# Altium PCB Jupiter PCB.PcbDoc (part 1 of 2)
Units mm, origin at the board's own origin, x right, y up, seen from the top; angles counter-clockwise.
Board outline 17.4 x 70.23 mm, 4 copper layers (Top Layer (SIG), Layer 1 (GND), Layer 2 (PWR), Bottom Layer (SIG)), stack 1.603 mm thick; 59 components, 32 nets, 227 pads, 175 vias.
Unrouted connection lines stored in the file: 2.
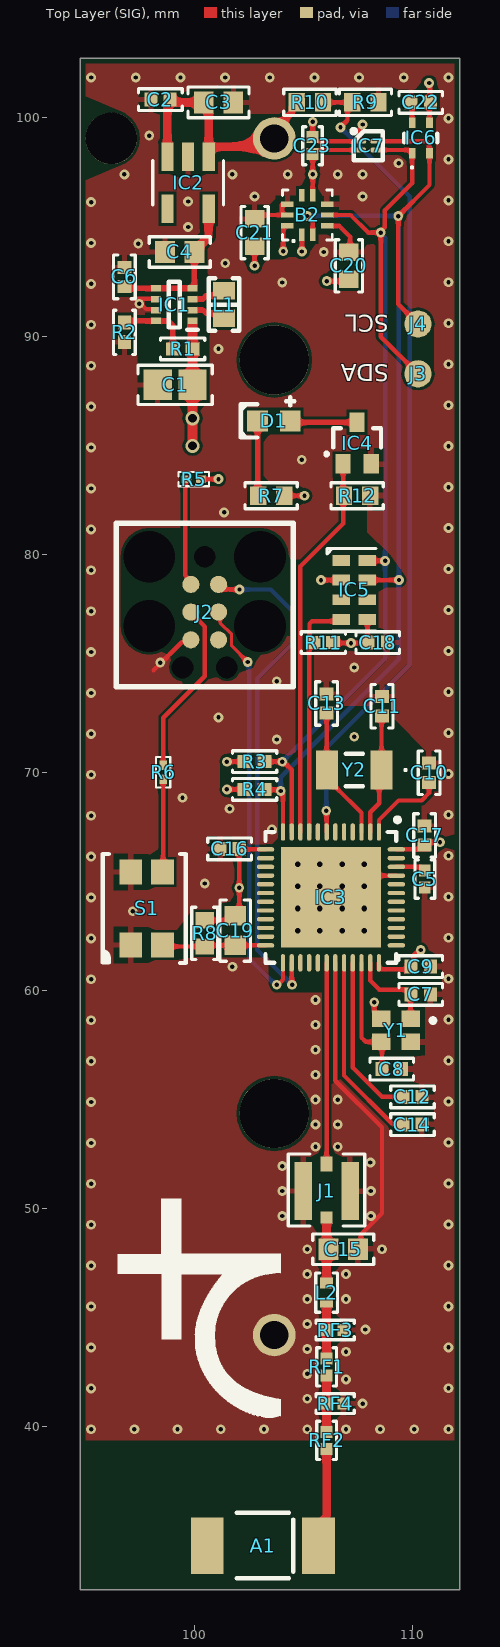
[diagram p0: Top Layer (SIG) view]
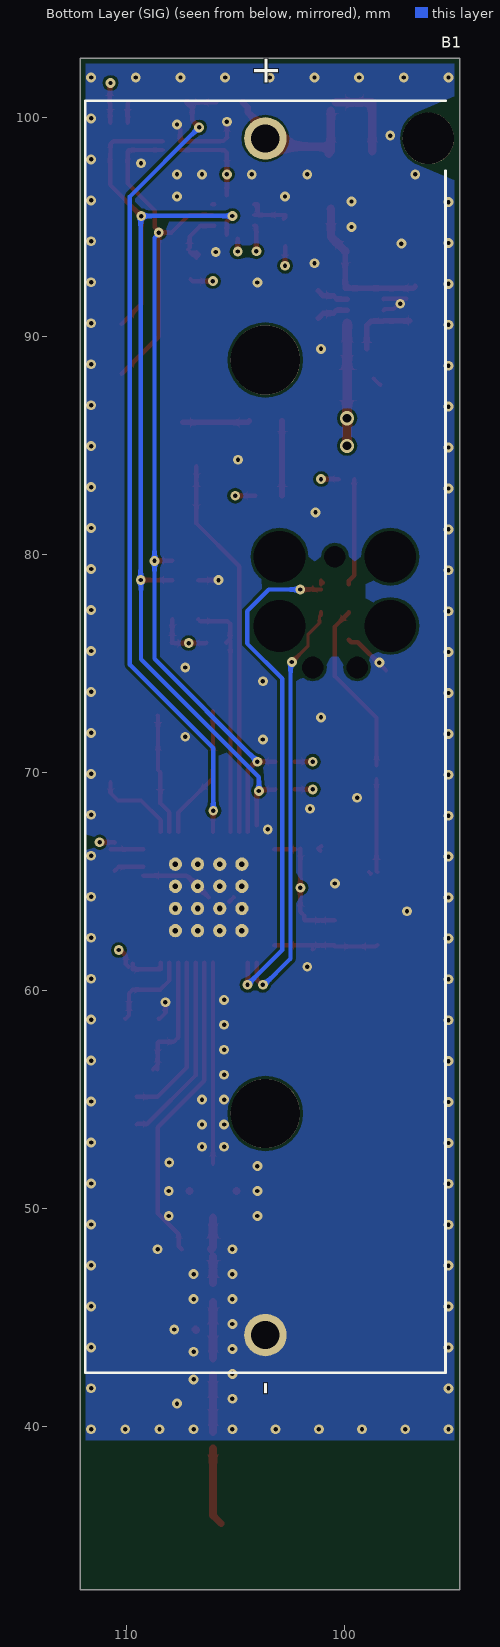
[diagram p1: Bottom Layer (SIG) view, seen from below]
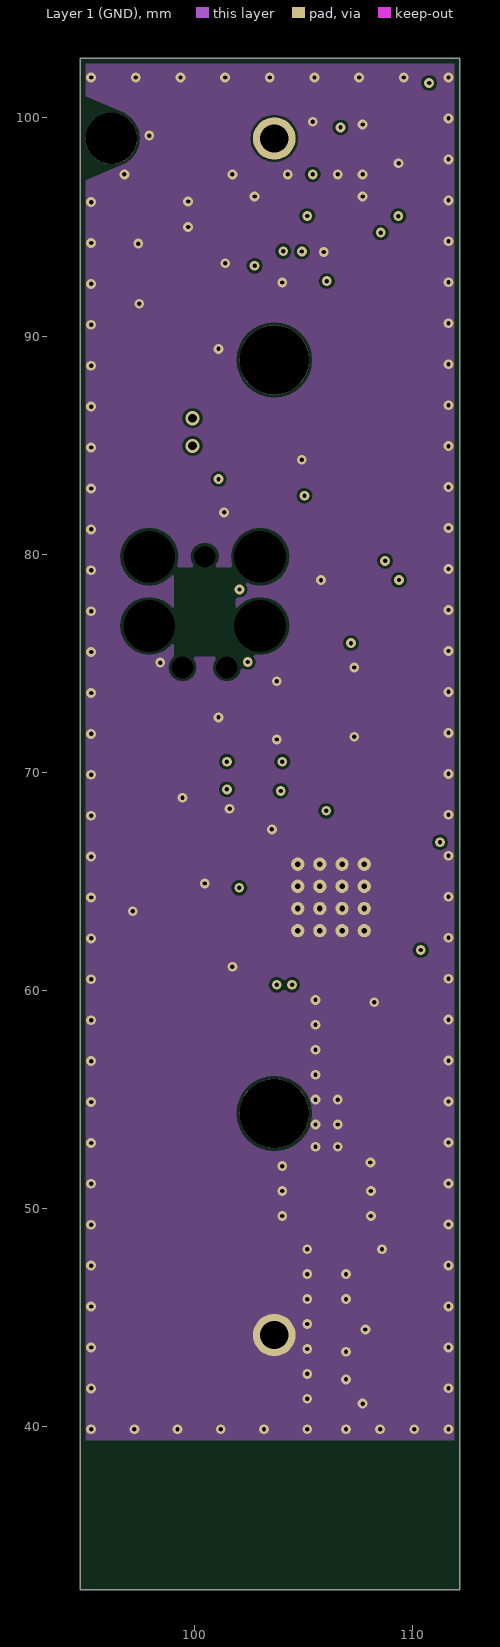
[diagram p2: Layer 1 (GND)]
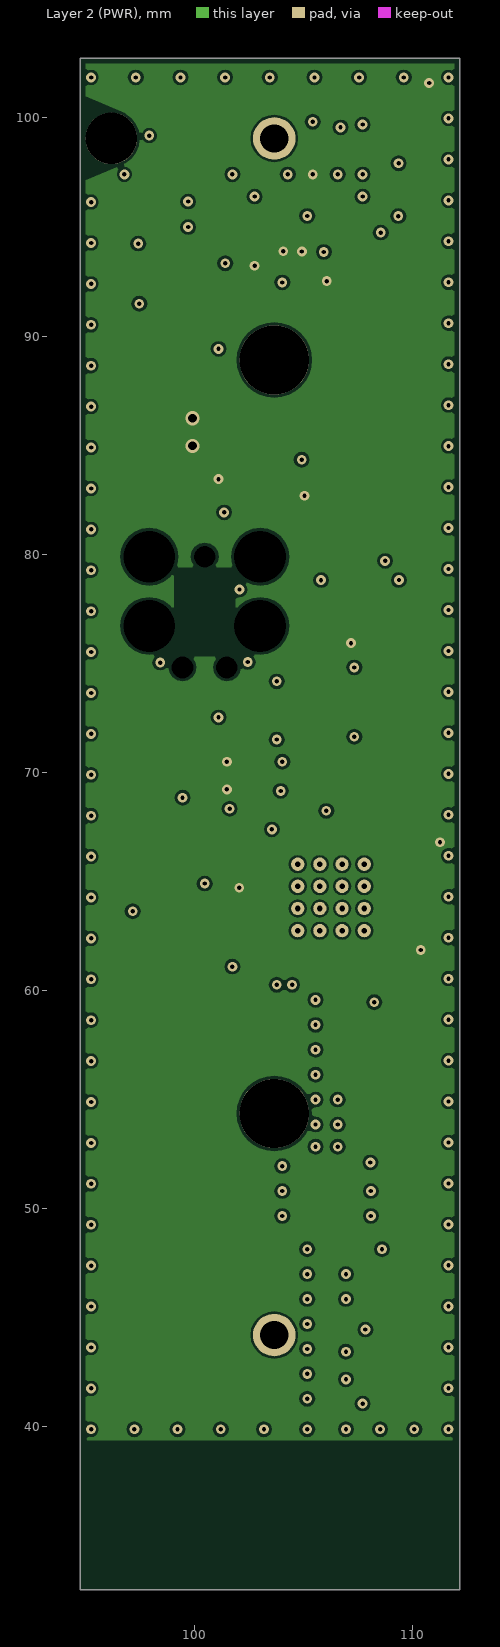
[diagram p3: Layer 2 (PWR)]

## Layer stack, top to bottom
Top Solder: solder mask 0.0102, Solder Resist, Dk 3.5
Top Layer (SIG): signal copper 0.0356
Dielectric 2: prepreg 0.0711, PP-006, Dk 4.1
Layer 1 (GND): signal copper 0.035
Dielectric 1: dielectric 1.32, FR-4, Dk 4.8
Layer 2 (PWR): signal copper 0.035
Dielectric 3: prepreg 0.0711, PP-006, Dk 4.1
Bottom Layer (SIG): signal copper 0.0356
Bottom Solder: solder mask 0.0102, Solder Resist, Dk 3.5

## Board outline
94.742,32.512 94.742,102.743 112.141,102.743 112.141,32.512

## Design rules (kind name [scope] priority, off if disabled: settings)
Clearance [All] p1: gap=0.127 ignorepadtopadclearanceinfootprint=FALSE except(0: Arc-SMDPad Arc-THPad Arc-Hole Track-SMDPad Track-THPad Track-Hole SMDPad-SMDPad SMDPad-THPad SMDPad-Hole THPad-THPad THPad-Via THPad-Fill THPad-Region THPad-Text THPad-Hole Fill-Hole Region-Hole Text-Hole; 0.102: THPad-Poly)
HoleSize [All] p1: absolutevalues=TRUE maxlimit=6 minlimit=0.025 maxpercent=80.000 minpercent=20.000
MinimumAnnularRing [All] p1: minimumring=0.051
MinimumSolderMaskSliver [All] p1: minsoldermaskwidth=0
PasteMaskExpansion [All] p1: expansion=0.127
PolygonConnect PolygonConnect_22 [All vs IsNamedPolygon('GND_L02_P001')] p1: thpad.connectstyle=Direct thpad.reliefconductorwidth=0.254 thpad.reliefentries=4 thpad.polygonreliefangle="90 Angle" thpad.airgapwidth=0.254 smdpad.connectstyle=Relief smdpad.reliefconductorwidth=0.254 smdpad.reliefentries=4 smdpad.polygonreliefangle="90 Angle" smdpad.airgapwidth=0.254 via.connectstyle=Direct via.reliefconductorwidth=0.254 via.reliefentries=4 via.polygonreliefangle="90 Angle" via.airgapwidth=0.254
PolygonConnect PolygonConnect_21 [All vs IsNamedPolygon('V_REG_3V_L03_P002')] p2: thpad.connectstyle=Direct thpad.reliefconductorwidth=0.254 thpad.reliefentries=4 thpad.polygonreliefangle="90 Angle" thpad.airgapwidth=0.254 smdpad.connectstyle=Relief smdpad.reliefconductorwidth=0.254 smdpad.reliefentries=4 smdpad.polygonreliefangle="90 Angle" smdpad.airgapwidth=0.254 via.connectstyle=Direct via.reliefconductorwidth=0.254 via.reliefentries=4 via.polygonreliefangle="90 Angle" via.airgapwidth=0.254
PolygonConnect PolygonConnect_20 [All vs IsNamedPolygon('GND_L04_P003')] p3: thpad.connectstyle=Direct thpad.reliefconductorwidth=0.254 thpad.reliefentries=4 thpad.polygonreliefangle="90 Angle" thpad.airgapwidth=0.254 smdpad.connectstyle=Relief smdpad.reliefconductorwidth=0.254 smdpad.reliefentries=4 smdpad.polygonreliefangle="90 Angle" smdpad.airgapwidth=0.254 via.connectstyle=Direct via.reliefconductorwidth=0.254 via.reliefentries=4 via.polygonreliefangle="90 Angle" via.airgapwidth=0.254
PolygonConnect PolygonConnect_19 [All vs IsNamedPolygon('GND_L01_P000')] p4: thpad.connectstyle=Direct thpad.reliefconductorwidth=0.254 thpad.reliefentries=4 thpad.polygonreliefangle="90 Angle" thpad.airgapwidth=0.254 smdpad.connectstyle=Relief smdpad.reliefconductorwidth=0.254 smdpad.reliefentries=4 smdpad.polygonreliefangle="90 Angle" smdpad.airgapwidth=0.254 via.connectstyle=Direct via.reliefconductorwidth=0.254 via.reliefentries=4 via.polygonreliefangle="90 Angle" via.airgapwidth=0.254
PolygonConnect PolygonConnect_18 [All vs IsNamedPolygon('NONET_L03_P004')] p5: connectstyle=Relief reliefconductorwidth=0.254 reliefentries=4 polygonreliefangle="90 Angle" airgapwidth=0.254
PolygonConnect PolygonConnect_17 [All vs IsNamedPolygon('NONET_L02_P003')] p6: connectstyle=Relief reliefconductorwidth=0.254 reliefentries=4 polygonreliefangle="90 Angle" airgapwidth=0.254
PolygonConnect PolygonConnect_16 [All vs IsNamedPolygon('NONET_L01_P002')] p7: connectstyle=Relief reliefconductorwidth=0.254 reliefentries=4 polygonreliefangle="90 Angle" airgapwidth=0.254
PolygonConnect PolygonConnect_15 [All vs IsNamedPolygon('GND_L01_P000')] p8: connectstyle=Relief reliefconductorwidth=0.254 reliefentries=4 polygonreliefangle="90 Angle" airgapwidth=0.254
PolygonConnect PolygonConnect_14 [All vs IsNamedPolygon('NONET_L03_P038')] p9: connectstyle=Relief reliefconductorwidth=0.254 reliefentries=4 polygonreliefangle="90 Angle" airgapwidth=0.254
PolygonConnect PolygonConnect_13 [All vs IsNamedPolygon('NONET_L02_P037')] p10: connectstyle=Relief reliefconductorwidth=0.254 reliefentries=4 polygonreliefangle="90 Angle" airgapwidth=0.254
PolygonConnect PolygonConnect_12 [All vs IsNamedPolygon('Top Layer-GND')] p11: connectstyle=Relief reliefconductorwidth=0.254 reliefentries=4 polygonreliefangle="90 Angle" airgapwidth=0.254
PolygonConnect PolygonConnect_11 [All vs IsNamedPolygon('Layer 2-V_REG_3V')] p12: connectstyle=Relief reliefconductorwidth=0.254 reliefentries=4 polygonreliefangle="90 Angle" airgapwidth=0.254
PolygonConnect PolygonConnect_10 [All vs IsNamedPolygon('Top Overlay-GND')] p13: connectstyle=Relief reliefconductorwidth=0.254 reliefentries=4 polygonreliefangle="90 Angle" airgapwidth=0.254
PolygonConnect PolygonConnect_9 [All vs IsNamedPolygon('NONET_L03_P018')] p14: connectstyle=Relief reliefconductorwidth=0.254 reliefentries=4 polygonreliefangle="90 Angle" airgapwidth=0.254
PolygonConnect PolygonConnect_8 [All vs IsNamedPolygon('NONET_L02_P017')] p15: connectstyle=Relief reliefconductorwidth=0.254 reliefentries=4 polygonreliefangle="90 Angle" airgapwidth=0.254
PolygonConnect PolygonConnect_7 [All vs IsNamedPolygon('NONET_L01_P016')] p16: connectstyle=Relief reliefconductorwidth=0.254 reliefentries=4 polygonreliefangle="90 Angle" airgapwidth=0.254
PolygonConnect PolygonConnect_6 [All vs IsNamedPolygon('NONET_L01_P016')] p17: connectstyle=Relief reliefconductorwidth=0.254 reliefentries=4 polygonreliefangle="90 Angle" airgapwidth=0.254
PolygonConnect PolygonConnect_5 [All vs IsNamedPolygon('NONET_L01_P015')] p18: connectstyle=Relief reliefconductorwidth=0.254 reliefentries=4 polygonreliefangle="90 Angle" airgapwidth=0.254
PolygonConnect PolygonConnect_4 [All vs IsNamedPolygon('NONET_L02_P014')] p19: connectstyle=Relief reliefconductorwidth=0.254 reliefentries=4 polygonreliefangle="90 Angle" airgapwidth=0.254
PolygonConnect PolygonConnect_3 [All vs IsNamedPolygon('NONET_L03_P013')] p20: connectstyle=Relief reliefconductorwidth=0.254 reliefentries=4 polygonreliefangle="90 Angle" airgapwidth=0.254
PolygonConnect PolygonConnect_2 [All vs IsNamedPolygon('NONET_L04_P012')] p21: connectstyle=Relief reliefconductorwidth=0.254 reliefentries=4 polygonreliefangle="90 Angle" airgapwidth=0.254
PolygonConnect PolygonConnect_1 [All vs IsNamedPolygon('GND_L01_P011')] p22: connectstyle=Relief reliefconductorwidth=0.254 reliefentries=4 polygonreliefangle="90 Angle" airgapwidth=0.254
PolygonConnect [All] p23: connectstyle=Relief reliefconductorwidth=0.254 reliefentries=4 polygonreliefangle="90 Angle" airgapwidth=0.254
RoutingVias [All] p1: holewidth=0.005 width=0.01 viastyle="Through Hole" minholewidth=0.005 minwidth=0.01 maxholewidth=0.254 maxwidth=0.457
SilkToSilkClearance [All] p1: silktosilkclearance=0
SilkToSolderMaskClearance [IsPad] p1: minsilkscreentomaskgap=0 clearancetoexposedcopper=TRUE
SolderMaskExpansion [All] p1: expansion=0.127 istentingtop=FALSE
Width [All] p1: maxlimit=0.762 minlimit=0.127 preferedwidth=0.178 midlayer1_minwidth=0.152 midlayer1_maxwidth=0.381 midlayer2_minwidth=0.152 midlayer2_maxwidth=0.381 bottomlayer_maxwidth=0.381 minimp=50.000000 maximp=50.000000 favimp=50.000000
25 further rules are at their usual default settings.

## Classes and differential pairs
component class Designator: A1 C5 C7 C8 C9 C10 C11 C12 C13 C14 C15 C16 C17 IC3 J1 J2 J3 J4 L2 R3 R4 R5 R6 RF1 RF2 RF3 RF4 Y1 Y2

## Components (designator, comment, footprint, x,y, rotation, side; value= is the part's Value field where it differs from the comment)
A1 "2.45GHz Antenna" "FRACTUS ANTENNAS FR01-S1-N-0-102" 103.124,34.544 r180 top
B1 "24.5mm Coin Cell (×1)" "MPD BHAA-3" 103.646,71.628 r90 bottom locked
B2 "BMP390" BMP390 105.16,95.548 r180 top value="-40°C ~ 125°C Temp Sense"
C1 "47µF" "CAP 0805_2012" 99.098,87.757 r0 top
C2 "0.1µF" "CAP 0402_1005" 98.425,100.838 r0 top
C3 "10pF" "CAP 0603_1608" 101.092,100.711 r180 top
C4 "10pF" "CAP 0603_1608" 99.314,93.853 r0 top
C5 "1µF" "CAP 0402_1005 RF" 110.549,65.097 r90 top
C6 "22uF" "CAP 0402_1005" 96.774,92.71 r270 top
C7 "8pF" "CAP 0402_1005" 110.363,59.817 r180 top
C8 "8pF" "CAP 0402_1005" 109.034,56.388 r0 top
C9 "0.1µF" "CAP 0402_1005" 110.363,61.087 r180 top
C10 "0.1µF" "CAP 0402_1005" 110.744,69.977 r90 top
C11 "9pF" "CAP 0402_1005" 108.585,73.025 r270 top
C12 "100pF" "CAP 0402_1005" 109.982,55.118 r0 top
C13 "9pF" "CAP 0402_1005" 106.045,73.152 r270 top
C14 "100pF" "CAP 0402_1005" 109.982,53.848 r0 top
C15 "0.8pF" "CAP 0603_1608" 106.807,48.133 r180 top
C16 "0.1µF" "CAP 0402_1005" 101.6,66.489 r0 top
C17 "4.7uF" "CAP 0402_1005" 110.542,67.102 r270 top
C18 "0.1µF" "CAP 0402_1005" 108.39,75.946 r180 top
C19 "0.15µF" "CAP 0603_1608" 101.854,62.738 r90 top
C20 "0.1µF" "CAP 0603_1608 RF" 107.061,93.218 r270 top
C21 "0.1µF" "CAP 0603_1608 RF" 102.743,94.742 r270 top
C22 "0.1µF" "CAP 0402_1005" 110.363,100.711 r0 top
C23 "2.2µF" "CAP 0402_1005 RF" 105.397,98.724 r270 top
D1 "RED" "LED 0603_1608" 103.632,86.106 r0 top
IC1 "Buck Regulator" "TI SOT-583" 99.06,91.44 r180 top
IC2 "Ideal Diode" "MAXIM SOT-23-5" 99.695,97.028 r270 top
IC3 "RF SoC" "NORDIC QFN-48" 106.245,64.262 r270 top
IC4 "NEXPERIA MOSFET N-CH SOT-323" "NEXPERIA SOT-323" 107.442,85.09 r90 top value=NFET
IC5 "Real Time Clock" "MICRO CRYSTAL 8-SON" 107.315,78.359 r0 top
IC6 "-40°C ~ 125°C Temp Sense" "SENSIRION SHT45" 110.363,99.079 r90 top
IC7 "MMC5633" "MEMSIC MMC5633" 107.95,98.727 r0 top value="Magnetoresistive Sensor X, Y, Z Axis"
J1 "Coaxial Switch" "HIROSE MS-156HF(01)" 106.045,50.8 r0 top
J2 "6 Pin J-Link Needle" "J-LINK 6-PIN NEEDLE" 100.457,79.883 r270 top
J3 "TEST POINT" "TEST POINT" 110.236,88.265 r0 top value="Test Point"
J4 "TEST POINT" "TEST POINT" 110.236,90.551 r0 top value="Test Point"
L1 "1.0µH" "NTC 0603_1608" 101.346,91.44 r270 top
L2 "3.9nH" "IND 0402_1005" 106.045,46.142 r270 top
R1 "511kΩ" "RES 0402_1005 RF" 99.448,89.408 r0 top
R2 "91kΩ" "RES 0402_1005 RF" 96.774,90.17 r90 top
R3 "4.7kΩ" "RES 0402_1005 RF" 102.743,70.485 r180 top
R4 "4.7kΩ" "RES 0402_1005 RF" 102.743,69.215 r180 top
R5 "33Ω" "RES 0201_0603" 99.949,83.439 r0 top
R6 "33Ω" "RES 0201_0603" 98.552,70.001 r270 top
R7 "60Ω" "RES 0603_1608 RF" 103.505,82.677 r180 top
R8 "249kΩ" "RES 0603_1608 RF" 100.457,62.611 r90 top
R9 "10MΩ" "RES 0603_1608 RF" 107.823,100.711 r0 top
R10 "1MΩ" "RES 0603_1608 RF" 105.283,100.711 r0 top
R11 "4.7kΩ" "RES 0402_1005 RF" 105.894,75.943 r0 top
R12 "1MΩ" "RES 0603_1608 RF" 107.442,82.677 r180 top
RF1 "0402" "0402_1005 RF" 106.045,42.741 r270 top
RF2 "0402" "0402_1005 RF" 106.045,39.37 r270 top
RF3 "0402" "0402_1005 RF" 106.435,44.427 r180 top
RF4 "0402" "0402_1005 RF" 106.435,41.056 r180 top
S1 "SPST-NO" "PANASONIC EVP-AA002K" 97.79,63.754 r90 top
Y1 "32.0000MHz" "ECS 320-8-37B" 109.22,58.166 r180 top
Y2 "32.7680kHz" "EPSON FC135R" 107.315,70.104 r180 top

## Footprints (in the part's own frame and the unit in brackets; to place one, negate y for a bottom-side part, rotate by r counter-clockwise, add the part's x,y. Pads: shape width x height; smd on the part's side, far side on the other; paste and mask are expansions set on the pad)
"0402_1005 RF" [mm] "2-Leads, Body 1.02x0.51mm, IPC High Density"
  rect 0.55x0.54 smd: 1(-0.39,0) 2(0.39,0)
  silkscreen extent -0.87,-0.45 0.87,0.45, body extent -0.5,-0.26 0.5,0.26, height 0.52
BMP390 [mm]
  rect 0.25x0.575 smd: 1(0.25,0.913) 2(-0.25,0.913) 6(-0.25,-0.913) 7(0.25,-0.913)
  rect 0.575x0.25 smd: 3(-0.912,0.5) 4(-0.912,0) 5(-0.912,-0.5) 8(0.912,-0.5) 9(0.912,0) 10(0.912,0.5)
  silkscreen extent -1.14,-1.14 1.14,1.24, body extent -1.02,-1.02 1.02,1.02, height 0.25
"CAP 0402_1005" [mm] "Chip Capacitor, 2-Leads, Body 1.02x0.51mm, IPC Medium Density"
  rect 0.6x0.64 smd mask+0.05: 1(-0.44,0) 2(0.44,0)
  silkscreen extent -1,-0.5 1,0.5, body extent -0.5,-0.26 0.5,0.26, height 0.52
"CAP 0402_1005 RF" [mm] "Chip Capacitor, 2-Leads, Body 1.02x0.51mm, IPC High Density"
  rect 0.55x0.54 smd mask+0.05: 1(-0.39,0) 2(0.39,0)
  silkscreen extent -0.87,-0.45 0.87,0.45, body extent -0.5,-0.26 0.5,0.26, height 0.52
"CAP 0603_1608" [mm] "Chip Capacitor, 2-Leads, Body 1.60x0.80mm, IPC Medium Density"
  rect 0.9x1 smd: 1(-0.675,0) 2(0.675,0)
  silkscreen extent -1.4,-0.7 1.4,0.7, body extent -0.8,-0.41 0.8,0.41, height 0.82
"CAP 0603_1608 RF" [mm] "Chip Capacitor, 2-Leads, Body 1.60x0.80mm, IPC High Density"
  rect 0.8x0.9 smd: 1(-0.625,0) 2(0.625,0)
  silkscreen extent -1.2,-0.63 1.2,0.63, body extent -0.8,-0.41 0.8,0.41, height 0.82
"CAP 0805_2012" [mm] "Chip Capacitor, 2-Leads, Body 2.00x1.20mm, IPC Medium Density"
  rect 1.3x1.4 smd: 1(-0.8,0) 2(0.8,0)
  silkscreen extent -1.7,-0.9 1.7,0.9, body extent -1,-0.64 1,0.64, height 1.26
"ECS 320-8-37B" [mm] "Crystal, 2-Leads, Body 4.10x7.00mm, Pitch 5.00mm, IPC Medium Density"
  rect 0.85x0.75 smd: 1(-0.675,-0.525) 2(0.675,-0.525) 3(0.675,0.525) 4(-0.675,0.525)
  silkscreen extent -1.8,-0.55 -1.6,-0.35, body extent -1,-0.8 1,0.8, height 0.5
"EPSON FC135R" [mm] "Crystal, 4-Leads, Body 2.50x3.20mm, Pitch 2.20mm, IPC Medium Density"
  rect 1x1.8 smd: 1(-1.25,0) 2(1.25,0)
  silkscreen extent -2.4,-0.75 0.4,0.75
"FRACTUS ANTENNAS FR01-S1-N-0-102" [mm]
  rect 1.5x2.6 smd: G(2.55,0) S(-2.55,0)
  silkscreen extent -1.4,-1.5 1.2,1.5, body extent -3.5,-1.5 3.5,1.5, height 2
"HIROSE MS-156HF(01)" [mm]
  rect 0.55x0.7 smd: A(0,1.245)
  rect 0.55x0.55 smd: C(0,-1.219)
  rect 0.8x2.65 smd: G(-1.075,0) G(1.075,0)
  silkscreen extent -1.75,-1.6 1.75,1.7, body extent -1.37,-1.37 1.38,1.45, height 2
"IND 0402_1005" [mm] "Inductor, 2-Leads, Body 1.02x0.51mm, IPC Medium Density"
  rect 0.5x0.6 smd: 1(-0.44,0) 2(0.44,0)
  silkscreen extent -0.9,-0.5 0.9,0.5, body extent -0.5,-0.3 0.5,0.3, height 0.6
"J-LINK 6-PIN NEEDLE" [mm]
  round 0.787 smd mask+0: 1(1.27,-0.635) 2(1.27,0.635) 3(2.54,-0.635) 4(2.54,0.635) 5(3.81,-0.635) 6(3.81,0.635)
  round 0 hole 2.375 unplated: NC(0,2.54) NC(0,-2.54) NC(3.175,2.54) NC(3.175,-2.54)
  round 0 hole 0.991 unplated: S(0,0) S(5.08,-1.016) S(5.08,1.016)
  silkscreen extent -1.52,-4.06 5.97,4.06
"LED 0603_1608" [mm]
  rect 0.95x0.95 smd: 1(-0.75,0) 2(0.75,0)
  silkscreen extent -1.52,-0.76 0.94,1.09
"MAXIM SOT-23-5" [mil] "SOT23, 6-Leads, Body 2.90x2.80mm, Pitch 0.95mm, IPC Medium Density"
  rect 52x22 smd: 1(-47,37.4) 2(-47,0) 3(-47,-37.4) 4(47,-37.4) 5(47,37.4)
  silkscreen extent -40,-64 40,64, body extent -59,-59 59,59, height 57
"MEMSIC MMC5633" [mm] "BGA, 6-Leads, Body 0.8x1.22mmx0.425mm, Pitch 0.40mm"
  oval 0.626x0.226 smd: A1(-0.4,0.2) A2(0.4,0.2) B1(-0.4,-0.2) B2(0.4,-0.2)
  silkscreen extent -0.76,-0.66 0.66,0.76, body extent -0.47,-0.47 0.48,0.47, height 0.6
"MICRO CRYSTAL 8-SON" [mm] "SON, 8-Leads, Body 3.20x1.50mm, Pitch 0.9mm, Thermal Pad 1.90x2.45mm, IPC Medium Density"
  rect 0.8x0.5 smd paste-3 mask+0.05: 1(-0.6,1.35) 2(-0.6,0.45) 3(-0.6,-0.45) 4(-0.6,-1.35) 5(0.6,-1.35) 6(0.6,-0.45) 7(0.6,0.45) 8(0.6,1.35)
  silkscreen extent -1.25,-1.9 1,1.9, body extent -0.75,-1.6 0.75,1.6, height 0.8
"MPD BHAA-3" [mm]
  round 1.95 hole 1.3: NEG(-27.43,0)
  round 1.95 hole 1.3 paste+0.25 mask+0.25: POS(27.43,0)
  round 3.18 hole 3.18 unplated: ""(-17.27,0) ""(17.27,0)
  round 2.36 hole 2.36 unplated: ""(27.43,-7.47)
  silkscreen extent -29.16,-8.26 29.16,8.26, body extent -29.09,-8.26 29.23,8.25, height 19.81
"NEXPERIA SOT-323" [mm] "SOT323, 3-Leads, Body 2.00x2.10mm, Pitch 0.65mm, IPC Medium Density"
  rect 0.9x0.7 smd: 1(-0.95,0.65) 2(-0.95,-0.65) 3(0.95,0)
  silkscreen extent -0.53,-1.1 0.67,1.43, body extent -1.05,-1.05 1.05,1.05, height 1
"NORDIC QFN-48" [mm] "QFN-48"
  oval 0.8x0.2 smd mask+0.06: 1(-3,2.2) 2(-3,1.8) 3(-3,1.4) 4(-3,1) 5(-3,0.6) 6(-3,0.2) 7(-3,-0.2) 8(-3,-0.6) 9(-3,-1) 10(-3,-1.4) 11(-3,-1.8) 12(-3,-2.2) 25(3,-2.2) 26(3,-1.8) 27(3,-1.4) 28(3,-1) 29(3,-0.6) 30(3,-0.2) 31(3,0.2) 32(3,0.6) 33(3,1) 34(3,1.4) 35(3,1.8) 36(3,2.2)
  oval 0.2x0.8 smd mask+0.06: 13(-2.2,-3) 14(-1.8,-3) 15(-1.4,-3) 16(-1,-3) 17(-0.6,-3) 18(-0.2,-3) 19(0.2,-3) 20(0.6,-3) 21(1,-3) 22(1.4,-3) 23(1.8,-3) 24(2.2,-3) 37(2.2,3) 38(1.8,3) 39(1.4,3) 40(1,3) 41(0.6,3) 42(0.2,3) 43(-0.2,3) 44(-0.6,3) 45(-1,3) 46(-1.4,3) 47(-1.8,3) 48(-2.2,3)
  round 0.61 hole 0.254 mask+0.102: EXP(-1.524,1.524) EXP(-1.524,0.508) EXP(-1.524,-0.508) EXP(-1.524,-1.524) EXP(-0.508,1.524) EXP(-0.508,0.508) EXP(-0.508,-0.508) EXP(-0.508,-1.524) EXP(0.508,1.524) EXP(0.508,0.508) EXP(0.508,-0.508) EXP(0.508,-1.524) EXP(1.524,1.524) EXP(1.524,0.508) EXP(1.524,-0.508) EXP(1.524,-1.524)
  rect 4.6x4.6 smd: EXP(0,0)
  silkscreen extent -3.66,-3 3,3.15, body extent -3.02,-3.02 3.02,3.02, height 0.85
"NTC 0603_1608" [mm] "NTC Thermistor, 2-Leads, Body 1.60x0.80mm, IPC Medium Density"
  rect 0.8x1 smd: 1(-0.625,0) 2(0.625,0)
  silkscreen extent -1.2,-0.7 1.2,0.7, body extent -0.8,-0.41 0.8,0.41, height 0.82
"PANASONIC EVP-AA002K" [mm] "4 Pins, 2.9 x 3.5mm"
  rect 1.15x1.05 smd: 1(-1.675,0.725) 1(1.675,0.725) 2(-1.675,-0.725) 2(1.675,-0.725)
  silkscreen extent -2.5,-1.8 2.5,2.01, body extent -2.15,-1.5 2.15,1.6, height 1.8
"RES 0201_0603" [mm] "Chip Resistor, 2-Leads, Body 0.60x0.30mm, IPC Medium Density"
  rect 0.44x0.35 smd mask+0.051: 1(-0.325,0) 2(0.325,0)
  silkscreen extent -0.7,-0.33 0.7,0.33, body extent -0.3,-0.15 0.3,0.15, height 0.21
"RES 0402_1005 RF" [mm] "Chip Resistor, 2-Leads, Body 1.0x0.5mm, IPC High Density"
  rect 0.65x0.6 smd mask+0.051: 1(-0.45,0) 2(0.45,0)
  silkscreen extent -1.02,-0.5 1.02,0.5, body extent -0.5,-0.25 0.5,0.25, height 0.35
"RES 0603_1608 RF" [mm] "Chip Resistor, 2-Leads, Body 1.60x0.80mm, IPC High Density"
  rect 0.75x0.85 smd: 1(-0.6,0) 2(0.6,0)
  silkscreen extent -1.2,-0.6 1.2,0.6, body extent -0.8,-0.4 0.8,0.4, height 0.45
"SENSIRION SHT45" [mm] "TDFN-4, Body 1.2x1.6mm, Pitch 0.50mm, Thermal Pad 0.90x0.50mm"
  rect 0.5x0.3 smd: 1(-0.7,0.4) 2(-0.7,-0.4) 3(0.7,-0.4) 4(0.7,0.4)
  silkscreen extent -1.4,-0.75 0.2,0.75, body extent -0.75,-0.75 0.75,0.75, height 0.54
"TEST POINT" [mm]
  round 1.25 smd: 1(0,0)
"TI SOT-583" [mm] "SOT89, 3-Leads, Body 4.50x2.50mm, Pitch 1.50mm, Lead Span 3.3mm, IPC Medium Density"
  rect 0.475x0.3 smd: 1(-0.838,0.75) 2(-0.838,0.25) 3(-0.838,-0.25) 4(-0.838,-0.75) 5(0.838,-0.75) 6(0.838,-0.25) 7(0.838,0.25) 8(0.838,0.75)
  silkscreen extent -1.07,-1.05 0.25,1.15, body extent -0.7,-1.1 0.7,1.1, height 0.5

## Part data
A1: library part ANT00000, "COMPACT REACH XTEND - 102", Frequency (Center/Band)=2.45GHz, Frequency Group="UHF (2GHz ~ 3GHz)", Frequency Range="2.4GHz ~ 2.5GHz", Manufacturer=Ignion, Manufacturer P/N=NN01-102, Operating Temperature="-40°C ~ 125°C", Package=7mm, Antenna Type=Chip, Device ID=ANT00000, Gain=1.7dBi, Mounting Type="Surface Mount", Part Type=Chip, Return Loss=-, RF Family/Standard="802.15.4, Bluetooth, WiFi", Supplier1=Digi-Key, Supplier1 P/N=2115-NN01-102CT-ND, Supplier2=Mouser, Supplier2 P/N=128-NN01-102, VSWR=2
B1: library part BCL00006, "BATTERY HOLDER AA PIN", Manufacturer="MPD (Memory Protection Devices)", Manufacturer P/N=BHAA-3‎, Operating Temperature="-55°C ~ 105°C", Battery Cell Size=AA, Device ID=BCL00006, Mounting Type="Through Hole", Number of Cells=1, Part Type="Battery Holder", Style="PC Pin", Supplier1=Digi-Key, Supplier1 P/N=BHAA-3-ND, Supplier2=-, Supplier2 P/N=-
B2: library part TMP00004, "PRESSURE", Manufacturer=BOSCH, Manufacturer_Name="Bosch Sensortec", Mouser Part Number=262-BMP390, Operating Temperature="-40°C ~ 125°C", Package=10-DFN, Sensing Temperature - Remote=-, Voltage - Supply="1.08V ~ 3.6V", Accuracy - Highest (Lowest)="±2°C (±3°C)", Datasheet Link=https://www.bosch-sensortec.com/media/boschsensortec/downloads/datasheets/bst-bmp390-ds002.pdf, Device ID=TMP00004, Features="One-Shot, Shutdown Mode", Geometry.Height=0.8mm, Manufacturer P/N=BMP390, Manufacturer_Part_Number=BMP390, Mounting Type="Surface Mount", Mouser Price/Stock=https://www.mouser.co.uk/ProductDetail/Bosch-Sensortec/BMP390?qs=QNEnbhJQKvYQVfvRMgo2YA%3D%3D, Output Type=I²C/SMBus, Part Type=IC, Resolution=16B, Sensing Temperature - Local="-40°C ~ 125°C", Sensor Type="Digital, Local", Supplier1=Digi-Key, Supplier1 P/N=403-SHT45-AD1B-R3, Supplier2=Mouser, Supplier2 P/N=1649-SHT45-AD1B-R3TR-ND, Test Condition="-10°C ~ 100°C (-40°C ~ 125°C)"
C1: library part CAP00052, "CAP CER 47UF 50V X7R 0805", Manufacturer=KEMET, Manufacturer P/N=C0805C223K5RAC7210, Operating Temperature="-55°C ~ 125°C", Package="0805 (2012 Metric)", Temperature Coefficient=X7R, Tolerance=±20%, Voltage=50V, Device ID=CAP00052, Mounting Type="Surface Mount", Part Type=Capacitor, Supplier1=Digi-Key, Supplier1 P/N=399-C0805C223K5RAC7210CT-ND, Supplier2=Mouser, Supplier2 P/N=80-C0805C223K5RACLR
C2 C9 C10 C16 C18 C22: library part CAP00001, "CAP CER 0.1UF 16V X7R 0402", Manufacturer=KEMET, Manufacturer P/N=C0402C104K4RAC7411, Operating Temperature="-55°C ~ 125°C", Package="0402 (1005 Metric)", Temperature Coefficient=X7R, Tolerance=±10%, Voltage=16V, Device ID=CAP00001, Mounting Type="Surface Mount", Part Type=Capacitor, Supplier1=Digi-Key, Supplier1 P/N=399-C0402C104K4RAC7411CT-ND, Supplier2=Mouser, Supplier2 P/N=80-C0402C104K4R7411
C3 C4: library part CAP00050, "CAP CER 10UF 6.3V X5R 0603", Manufacturer=KEMET, Manufacturer P/N=CL10A106MQ8NNNC, Operating Temperature="-55°C ~ 125°C", Package="0603 (1608 Metric)", Temperature Coefficient=X5R, Tolerance=±20%, Voltage=6.3V, Device ID=CAP00050, Mounting Type="Surface Mount", Part Type=Capacitor, Supplier1=Digi-Key, Supplier1 P/N=1276-1119-2-ND, Supplier2=Mouser, Supplier2 P/N=187-CL10A106MQ8NNNC
C5: library part CAP00027, "CAP CER 1UF 10V X7S 0402", Manufacturer="Murata Electronics", Manufacturer P/N=GCM155C71A105ME38D, Operating Temperature="-55°C ~ 125°C", Package="0402 (1005 Metric)", Temperature Coefficient=X7S, Tolerance=±20%, Voltage=10V, Device ID=CAP00027, Mounting Type="Surface Mount", Part Type=Capacitor, Supplier1=Digi-Key, Supplier1 P/N=490-18202-1-ND, Supplier2=Mouser, Supplier2 P/N=81-GCM155C71A105ME8D
C6: library part CAP00053, "CAP CER 22UF 50V NPO 0402", Manufacturer=Walsin, Manufacturer P/N=0402N9R0B500CT, Operating Temperature="-55°C ~ 125°C", Package="0402 (1005 Metric)", Temperature Coefficient="C0G, NP0", Tolerance=±0.1%, Voltage=50V, Device ID=CAP00053, Mounting Type="Surface Mount", Part Type=Capacitor, Supplier1=Digi-Key, Supplier1 P/N=1292-0402N9R0B500CTTR-ND, Supplier2=Mouser, Supplier2 P/N=791-0402N9R0B500CT
C7 C8: library part CAP00054, "CAP CER 8PF 50V NPO 0402", Manufacturer=Walsin, Manufacturer P/N=0402N9R0B500CT, Operating Temperature="-55°C ~ 125°C", Package="0402 (1005 Metric)", Temperature Coefficient="C0G, NP0", Tolerance=±0.1%, Voltage=50V, Device ID=CAP00054, Mounting Type="Surface Mount", Part Type=Capacitor, Supplier1=Digi-Key, Supplier1 P/N=1292-0402N9R0B500CTTR-ND, Supplier2=Mouser, Supplier2 P/N=791-0402N9R0B500CT
C11 C13: library part CAP0004E, "CAP CER 9PF 50V NPO 0402", Manufacturer=Walsin, Manufacturer P/N=0402N9R0B500CT, Operating Temperature="-55°C ~ 125°C", Package="0402 (1005 Metric)", Temperature Coefficient="C0G, NP0", Tolerance=±0.1%, Voltage=50V, Device ID=CAP0004E, Mounting Type="Surface Mount", Part Type=Capacitor, Supplier1=Digi-Key, Supplier1 P/N=1292-0402N9R0B500CTTR-ND, Supplier2=Mouser, Supplier2 P/N=791-0402N9R0B500CT
C12 C14: library part CAP00000, "CAP CER 100PF 16V C0G/NP0 0402", Manufacturer=KEMET, Manufacturer P/N=C0402C101K4GACTU, Operating Temperature="-55°C ~ 125°C", Package="0402 (1005 Metric)", Temperature Coefficient="C0G, NP0", Tolerance=±10%, Voltage=16V, Device ID=CAP00000, Mounting Type="Surface Mount", Part Type=Capacitor, Supplier1=Digi-Key, Supplier1 P/N=399-7749-1-ND, Supplier2=Mouser, Supplier2 P/N=80-C0402C101K4G
C15: library part CAP0004D, "CAP CER 0.8PF 50V NP0  0603", Manufacturer=Walsin, Manufacturer P/N=0603N0R8C500CT, Operating Temperature="-55°C ~ 125°C", Package="0603 (1608 Metric)", Temperature Coefficient="C0G, NP0", Tolerance=±0.25pF, Voltage=50V, Device ID=CAP0004D, Mounting Type="Surface Mount", Part Type=Capacitor, Supplier2=Mouser, Supplier2 P/N=791-0603N0R8C500CT
C17: library part CAP00055, "CAP CER 8PF 50V NPO 0402", Manufacturer="Samsung Electro-Mechanics", Manufacturer P/N=CL05A475KQ5NRNC, Operating Temperature="-55°C ~ 125°C", Package="0402 (1005 Metric)", Temperature Coefficient=X5R, Tolerance=±10%, Voltage=10V, Device ID=CAP00055, Mounting Type="Surface Mount", Part Type=Capacitor, Supplier1=Digi-Key, Supplier1 P/N=187-CL05A475KQ5NRNC, Supplier2=Mouser, Supplier2 P/N=187-CL05A475KQ5NRNC
C19: library part CAP00008, "CAP CER 0.15UF 10V X7R 0603", Manufacturer=KEMET, Manufacturer P/N=C0603C154K8RACTU, Operating Temperature="-55°C ~ 125°C", Package="0603 (1608 Metric)", Temperature Coefficient=X7R, Tolerance=±10%, Voltage=10V, Device ID=CAP00008, Mounting Type="Surface Mount", Part Type=Capacitor, Supplier1=Digi-Key, Supplier1 P/N=399-7862-1-ND, Supplier2=Mouser, Supplier2 P/N=80-C0603C154K8R
C20 C21: library part CAP00039, "CAP CER 0.1UF 16V X7R 0603", Manufacturer=KEMET, Manufacturer P/N=C0603C104M4RACAUTO, Operating Temperature="-55°C ~ 125°C", Package="0603 (1608 Metric)", Temperature Coefficient=X7R, Tolerance=±20%, Voltage=16V, Device ID=CAP00039, Mounting Type="Surface Mount", Part Type=Capacitor, Supplier1=Digi-Key, Supplier1 P/N=399-C0603C104M4RACAUTOCT-ND, Supplier2=Mouser, Supplier2 P/N=C0603C104M4RACAUTO
C23: library part CAP00028, "CAP CER 2.2UF 10V X7S 0402", Manufacturer="Murata Electronics", Manufacturer P/N=GRT155C71A225KE13D, Operating Temperature="-55°C ~ 125°C", Package="0402 (1005 Metric)", Temperature Coefficient=X7S, Tolerance=±10%, Voltage=10V, Device ID=CAP00028, Mounting Type="Surface Mount", Part Type=Capacitor, Supplier1=Digi-Key, Supplier1 P/N=490-16304-1-ND, Supplier2=Mouser, Supplier2 P/N=81-GRT155C71A225KE3D
D1: library part LED0000A, "LED RED CLEAR 0603 SMD", Color=Red, If - Forward Current=100mA, Lens Color=Colorless, Manufacturer="Würth Elektronik", Manufacturer P/N=150060RS75000, Operating Temperature="-40°C ~ 85°C", Package="0603 (1608 Metric)", Vf - Forward Voltage=2.0V, Device ID=LED0000A, Mounting Type="Surface Mount", Part Type=LED, Supplier1=Digi-Key, Supplier1 P/N=732-4978-1-ND, Viewing Angle=140°, Wavelength=625nm
IC1: library part VRG00007, "DC DC CONVERTER", Current - Output=2A, Frequency - Switching=-, Manufacturer="Texas Instruments", Manufacturer P/N=TPS631000DRLR, Operating Temperature="-40°C ~ 125°C (TJ)", Package=SOT-583, Voltage - Input (Max)=5.5V, Voltage - Input (Min)=1.6V, Voltage - Output (Max)=5.3V, Voltage - Output (Min/Fixed)=1.2V, Device ID=VRG00007, Function=Step-Down, Mounting Type="Surface Mount", Number of Outputs=1, Part Type=IC, Supplier1=Digi-Key, Supplier1 P/N=296-TPS631000DRLRTR-ND, Supplier2=Mouser, Supplier2 P/N=595-TPS631000DRLR, Synchronous Rectifier=-
IC2: library part DCN00002, "IC IDEAL DIODE", Current - Output (Max)=1.5A, Manufacturer="Texas Instruments", Manufacturer P/N=LM66100DCKR, Operating Temperature="-40°C ~ 105°C", Package=SOT-363, Voltage - Supply="1.5V ~ 5.5V", Applications="General Purpose", Delay Time - OFF="2 µs", Delay Time - ON="27 µs", Device ID=DCN00002, FET Type=P-Channel, Internal Switch(s)=Yes, Mounting Type="Surface Mount", Part Type=IC, Ratio - Input:Output=1:1, Supplier1=Digi-Key, Supplier1 P/N=296-53541-1-ND, Supplier2=Mouser, Supplier2 P/N=595-LM66100DCKR
IC3: library part SOC00001, "IC RF TXRX+MCU BLUETOOTH 48VFQFN", Current - Receiving="5.5mA ~ 10.4mA", Current - Transmitting="5.5mA ~ 15.2mA", Frequency=2.4GHz, Manufacturer="Nordic Semiconductor", Manufacturer P/N=nRF52832-QFAA-R, Operating Temperature="-40°C ~ 85°C", Package=QFN-48, Power Output=4dBm, Voltage Supply="1.7V ~ 3.6V", Data Rate (Max)=2Mbps, Device ID=SOC00001, GPIO=32, Memory Size="512kB Flash, 64kB RAM", Mounting Type="Surface Mount", Part Type=IC, Sensitivity=-96dBm, Supplier1=Digi-Key, Supplier1 P/N=1490-1052-1-ND, Supplier2=Digi-Key, Supplier2 P/N=1490-1067-1-ND, Supplier3=Mouser, Supplier3 P/N=949-NRF52832-QFAA-R7
IC4: library part MOS00000, "MOSFET N-CH 60V 320MA SOT323", Current - Continuous Drain (Id) @ 25°C="320mA (Ta)", Drain to Source Voltage (Vdss)=60V, Drive Voltage (Max Rds On, Min Rds On)=10V, Input Capacitance (Ciss) (Max) @ Vds="50 pF @ 10 V", Manufacturer="Nexperia USA Inc.", Manufacturer P/N=BSS138PW,115, Operating Temperature="-55°C ~ 150°C (TA)", Package=SOT-323, Power Dissipation (Max)="260mW (Ta), 830mW (Tc)", Device ID=MOS00000, FET Feature=-, FET Type=N-Channel, Gate Charge (Qg) (Max) @ Vgs="0.8 nC @ 4.5 V", Mounting Type="Surface Mount", Part Type=IC, Rds On (Max) @ Id, Vgs="1.6Ohm @ 300mA, 10V", Supplier1=Digi-Key, Supplier1 P/N=1727-1143-1-ND, Supplier2=Mouser, Supplier2 P/N=771-BSS138PW115, Technology="MOSFET (Metal Oxide)", Vgs (Max)=±20V, Vgs(th) (Max) @ Id="1.5V @ 250µA"
IC5: library part RTC00001, "IC RTC CLK/CALENDAR I2C 8-SMT", Current - Timekeeping Max="240nA @ 3V", Manufacturer="Micro Crystal AG", Manufacturer P/N=RV-8263-C7-32.768KHZ-20PPM-TA-QC, Operating Temperature="-40°C ~ 85°C", Package="8-SON (3.2x1.5)", Voltage - Supply="0.9V ~ 5.5V", Voltage - Supply Battery=-, Date Format=YY-MM-DD-dd, Device ID=RTC00001, Features="Alarm, Leap Year, RAM", Interface=I²C, Memory Size=-, Part Type=IC, Supplier1=Digi-Key, Supplier1 P/N=2195-RV-8263-C7-32.768KHZ-20PPM-TA-QCCT-ND, Supplier2=Mouser, Supplier2 P/N=428-8263C7328K20PTQC, Time Format=HH:MM:SS
IC6: library part TMP00003, "SENSOR HUMID/TEMP HIGH ACCURACY", Manufacturer="Sensirion AG", Manufacturer P/N=SHT45-AD1B-R3, Operating Temperature="-40°C ~ 125°C", Package=4-DFN, Sensing Temperature - Remote=-, Voltage - Supply="1.08V ~ 3.6V", Accuracy - Highest (Lowest)="±2°C (±3°C)", Device ID=TMP00003, Features="One-Shot, Shutdown Mode", Mounting Type="Surface Mount", Output Type=I²C/SMBus, Part Type=IC, Resolution=16B, Sensing Temperature - Local="-40°C ~ 125°C", Sensor Type="Digital, Local", Supplier1=Digi-Key, Supplier1 P/N=403-SHT45-AD1B-R3, Supplier2=Mouser, Supplier2 P/N=1649-SHT45-AD1B-R3TR-ND, Test Condition="-10°C ~ 100°C (-40°C ~ 125°C)"
IC7: library part MAG00002, "30 GAUSS, MONOLITHIC, HIGH PERFO", Current - Output (Max)=-, Current - Supply (Max)="0.4µA (Typ)", Manufacturer=MEMSIC, Manufacturer P/N=MMC5633NJL, Operating Temperature="-40°C ~ 125°C (TA)", Package=BGA-2x2, Voltage - Supply="1.62V ~ 3.6V", Axis=Triple, Bandwidth=1kKz, Device ID=MAG00002, Features="Temperature Compensated", Mounting Type="Surface Mount", Output Type=I²C, Part Type=IC, Resolution=20b, Sensing Range=±3mT, Supplier1=Digi-Key, Supplier1 P/N=1267-MMC5633NJLTR-ND, Supplier2=Mouser, Supplier2 P/N=438-MMC5633NJL, Technology="Hall Effect"
J1: library part RFC00001, "CONN COAX SWITCH RCPT STR 50OHM", Frequency - Max=6GHz, Manufacturer="Hirose Electric Co Ltd", Manufacturer P/N=MS-156HF(01), Operating Temperature="-40°C ~ 85°C", Cable Group=-, Connector Style=MS-156HF(01), Connector Type="Receptacle, Female Socket", Contact Termination=Solder, Device ID=RFC00001, Fastening Type=Snap-On, Impedance=50Ω, Mating Cycles=100, Mounting Type="Surface Mount", Package="Coaxial Switch", Part Type="RF Connector", Shield Termination=Solder, Supplier1=Digi-Key, Supplier1 P/N=H11669-ND, Supplier2=Mouser, Supplier2 P/N=798-MS156HF01
J2: library part "J-LINK 6-PIN NEEDLE ADAPTER", Current Rating (Amps)=-, Package=N/A, Connector Type=Board, Contact Finish - Mating=-, Contact Type=Pogo-Pins, Device ID=CON00004, Fastening Type=-, Insulation Color=-, Manufacturer=-, Manufacturer P/N=-, Material Flammability Rating=-, Mounting Type="Board Connector", Number of Positions=6, Number of Positions Loaded=All, Operating Temperature=-, Part Type=Header, Pitch - Mating="0.050\" (1.27mm)", Style=On-Board, Supplier1=-, Supplier1 P/N=-, Supplier2=-, Supplier2 P/N=--, Voltage Rating=-
J3 J4: library part -, Connector Type=Pad, Contact Finish - Mating=Gold, Contact Type=Pad, Current Rating (Amps)=-, Device ID=CON00015, Fastening Type=-, Insulation Color=-, Manufacturer=-, Manufacturer P/N=-, Material Flammability Rating=-, Mounting Type="Surface Mount", Number of Positions=1, Number of Positions Loaded=All, Operating Temperature=-, Package=-, Part Type=Header, Pitch - Mating=-, Style=Pad, Supplier1=-, Supplier1 P/N=-, Supplier2=-, Supplier2 P/N=-, Voltage Rating=-
L1: library part IND00005, "FIXED IND 1.0UH 16V", Current Saturation=90mA, DC Resistance=1.050Ω, Frequency - Self Resonant=-, Manufacturer="TDK Corporation", Manufacturer P/N=C2012X5R1C106K, Operating Temperature="-55°C ~ 125°C", Package="0603 (1608 Metric)", Tolerance=±20%, Device ID=IND00005, Material - Core=Ferrite, Mounting Type="Surface Mount", Part Type=Inductor, Q @ Freq=-, Supplier1=Digi-Key, Supplier1 P/N=445-175588-1-ND, Supplier2=Mouser, Supplier2 P/N=810-MLZ1608M100WTD25
L2: library part IND00004, "FIXED IND 3.9NH 250MA 450MOHM SM", Current Saturation=-, DC Resistance=0.460Ω, Frequency - Self Resonant=8GHz, Manufacturer="KYOCERA AVX", Manufacturer P/N=L04023R9BHNTR, Operating Temperature="-55°C ~ 125°C", Package="0402 (1005 Metric)", Q @ Freq="13 @ 450MHz", Tolerance=±0.1%, Device ID=IND00004, Material - Core=Non-Magnetic, Mounting Type="Surface Mount", Part Type=Inductor, Supplier1=Digi-Key, Supplier1 P/N=478-4199-2-ND, Supplier2=Mouser, Supplier2 P/N=581-L04023R9BHNTR
R1: library part RES0003C, "RES SMD 4.7K OHM 1% 1/8W 0402", Manufacturer=YAGEO, Manufacturer P/N=AC0402FR-7W4K7L, Operating Temperature="-55°C ~ 155°C", Package="0402 (1005 Metric)", Power=0.125W, Tolerance=±1%, Composition="Thick Film", Device ID=RES0003C, Mounting Type="Surface Mount", Part Type=Resistor, Supplier1=Digi-Key, Supplier1 P/N=603-AC0402FR-7W4K7L, Supplier2=Mouser, Supplier2 P/N=603-AC0402FR-7W4K7L
R2: library part RES0003D, "RES SMD 4.7K OHM 1% 1/8W 0402", Manufacturer=YAGEO, Manufacturer P/N=AC0402FR-7W4K7L, Operating Temperature="-55°C ~ 155°C", Package="0402 (1005 Metric)", Power=0.125W, Tolerance=±1%, Composition="Thick Film", Device ID=RES0003D, Mounting Type="Surface Mount", Part Type=Resistor, Supplier1=Digi-Key, Supplier1 P/N=603-AC0402FR-7W4K7L, Supplier2=Mouser, Supplier2 P/N=603-AC0402FR-7W4K7L
R3 R4 R11: library part RES0003B, "RES SMD 4.7K OHM 1% 1/8W 0402", Manufacturer=YAGEO, Manufacturer P/N=AC0402FR-7W4K7L, Operating Temperature="-55°C ~ 155°C", Package="0402 (1005 Metric)", Power=0.125W, Tolerance=±1%, Composition="Thick Film", Device ID=RES0003B, Mounting Type="Surface Mount", Part Type=Resistor, Supplier1=Digi-Key, Supplier1 P/N=603-AC0402FR-7W4K7L, Supplier2=Mouser, Supplier2 P/N=603-AC0402FR-7W4K7L
R5 R6: library part RES0003A, "RES SMD 33 OHM 1% 1/20W 0201", Manufacturer="Vishay Dale", Manufacturer P/N=CRCW020110R0FNED, Operating Temperature="-55°C ~ 155°C", Package="0201 (0603 Metric)", Power=0.050W, Tolerance=±1%, Composition="Thick Film", Device ID=RES0003A, Mounting Type="Surface Mount", Part Type=Resistor, Supplier1=Digi-Key, Supplier1 P/N=541-10.0ABCT-ND, Supplier2=Mouser, Supplier2 P/N=71-CRCW020110R0FNED
R7: library part RES00034, "RES 60 OHM 1% 1/10W 0603", Manufacturer="Vishay Dale", Manufacturer P/N=‎CRCW0603820KFKEAC‎, Operating Temperature="-55°C ~ 155°C", Package="0603 (1608 Metric)", Power=0.100W, Tolerance=±1%, Composition="Thick Film", Device ID=RES00034, Mounting Type="Surface Mount", Part Type=Resistor, Supplier1=Digi-Key, Supplier1 P/N=‎541-5568-1-ND‎, Supplier2=Mouser, Supplier2 P/N=71-CRCW0603820KFKEAC
R8: library part RES0000A, "RES SMD 249K OHM 0.1% 1/10W 0603", Manufacturer=Susumu, Manufacturer P/N=RG1608P-2493-B-T5, Operating Temperature="-55°C ~ 155°C", Package="0603 (1608 Metric)", Power=0.100W, Tolerance=±0.1%, Composition="Thin Film", Device ID=RES0000A, Mounting Type="Surface Mount", Part Type=Resistor, Supplier1=Digi-Key, Supplier1 P/N=RG16P249KBCT-ND, Supplier2=Mouser, Supplier2 P/N=754-RG1608P-2493-BT5
R9: library part RES0003F, "RES 10M OHM 1% 1/10W 0603", Manufacturer="Vishay Dale", Manufacturer P/N=‎CRCW0603820KFKEAC‎, Operating Temperature="-55°C ~ 155°C", Package="0603 (1608 Metric)", Power=0.100W, Tolerance=±1%, Composition="Thick Film", Device ID=RES0003F, Mounting Type="Surface Mount", Part Type=Resistor, Supplier1=Digi-Key, Supplier1 P/N=‎541-5568-1-ND‎, Supplier2=Mouser, Supplier2 P/N=71-CRCW0603820KFKEAC
R10 R12: library part RES0003E, "RES 1M OHM 1% 1/10W 0603", Manufacturer="Vishay Dale", Manufacturer P/N=‎CRCW0603820KFKEAC‎, Operating Temperature="-55°C ~ 155°C", Package="0603 (1608 Metric)", Power=0.100W, Tolerance=±1%, Composition="Thick Film", Device ID=RES0003E, Mounting Type="Surface Mount", Part Type=Resistor, Supplier1=Digi-Key, Supplier1 P/N=‎541-5568-1-ND‎, Supplier2=Mouser, Supplier2 P/N=71-CRCW0603820KFKEAC
RF1 RF2 RF3 RF4: library part RFP00000, "0402 RF Passive", Device ID=RFP00000, Mounting Type="Surface Mount", Part Type=Passive
S1: library part BUT00002, "SWITCH TACTILE SPST-NO 0.02A 15V", Contact Rating @ Voltage="0.02A @ 15VDC", Manufacturer="Panasonic Electronic Components", Manufacturer P/N=EVP-AA002K, Operating Force=100gf, Operating Temperature="-40°C ~ 85°C", Package="4-Lead SMT", Device ID=BUT00002, Mounting Type="Surface Mount", Part Type=Button, Supplier1=Digi-Key, Supplier1 P/N=P13347SCT-ND, Supplier2=Mouser, Supplier2 P/N=667-EVP-AA002K, Switch Function=Off-Mom
Y1: library part XTL00005, "CRYSTAL 32.0000MHZ 8PF SMD", Load Capacitance=8pF, Manufacturer=ECS, Manufacturer P/N=ECS-320-8-37B-7KM-TR3, Operating Mode=Fundamental, Operating Temperature="-20°C ~ 70°C", Package="4-SMD, No Lead", Tolerance=±7ppm, Device ID=XTL00005, ESR=50Ω, Mounting Type="Surface Mount", Part Type=XTAL, Supplier1=Digi-Key, Supplier1 P/N=50-ECS-320-8-37B-7KM-TR3TR-ND, Supplier2=Mouser, Supplier2 P/N="520-ECS320837B7KMTR3 / 729-G43270021"
Y2: library part XTL00004, "CRYSTAL 32.7680KHZ 9PF SMD", Load Capacitance=9pF, Manufacturer=EPSON, Manufacturer P/N="FC-135R 32.7680KF-AC3", Operating Mode=Fundamental, Operating Temperature="-20°C ~ 70°C", Package="2-SMD, No Lead", Tolerance=±10ppm, Device ID=XTL00004, ESR=50kΩ, Mounting Type="Surface Mount", Part Type=XTAL, Supplier1=Digi-Key, Supplier1 P/N=SER4075TR-ND, Supplier2=Mouser, Supplier2 P/N="732-5R32.7680KF-AC3 / 729-G43270021"

## Via types
v1: diameter 0.45, hole 0.2, Top Layer (SIG) to Bottom Layer (SIG), 173 vias
v2: diameter 0.65, hole 0.4, Top Layer (SIG) to Bottom Layer (SIG), 2 vias

## Nets (pads, with @x,y where several pads share a name; then routed paths per layer and width w, separated by ;. In a path a pad name is that pad's centre, name@x,y a point inside that pad or via, vN(x,y) a via of type N, cw(c..) or ccw(c..) an arc to the next point about the centre after c; other vN are vias at no path point)
ANT: IC3.30 J1.A | length 9.2
  Top Layer (SIG) w0.2: J1.A IC3.30
BAT_ADC: IC3.7 R9.1 R10.2 | length 37.9
  Top Layer (SIG) w0.2: R10.2 R9.1 ; v1(106.032,68.231) 106.045,68.218 IC3.7 ; v1@106.68,99.568 107,99.888 R9.1@107,100.488
  Top Layer (SIG) w0.305: R9.1@107,100.488 R9.1
  Bottom Layer (SIG) w0.2: v1(106.032,68.231) 106.032,71.107 109.855,74.93 109.855,96.395 v1(106.684,99.566)
DEC1: C10.1 IC3.1 | length 3.8
  Top Layer (SIG) w0.2: IC3.1 108.445,67.805 109.347,68.707 110.403,68.707 110.744,69.048 C10.1
DEC2: C14.1 IC3.32 | length 8.8
  Top Layer (SIG) w0.2: IC3.32 106.845,56.096 109.059,53.882 109.508,53.882 C14.1
DEC3: C12.1 IC3.33 | length 7.7
  Top Layer (SIG) w0.2: IC3.33 107.245,56.458 108.585,55.118 C12.1
DEC4: C5.2 IC3.46 | length 1.4
  Top Layer (SIG) w0.2: IC3.46 110.374,65.662 C5.2
GND: B1.NEG B2.3 B2.5 B2.8 B2.9 C1.1 C2.1 C3.1 C4.1 C5.1 C6.1 C7.1 C8.2 C9.1 C10.2 C11.1 C12.2 C13.1 C14.2 C15.1 C16.1 C17.1 C18.1 C20.1 C21.1 C22.1 C23.1 IC1.6 IC1.7 IC2.2 IC3.31 IC3.45 IC3.EXP IC4.2 IC5.2 IC6.4 IC7.A1 J1.G J2.5 R2.1 R9.2 R12.1 RF3.1 RF4.1 S1.1 Y1.2 Y1.4 | length 35.2
  Top Layer (SIG) w0.2: 98.112,74.676 98.237,74.801 98.247,74.801 99.407,75.961 99.71,75.961 J2.5 ; IC3.EXP@105.102,64.262 IC3.EXP@105.302,64.062
  Top Layer (SIG) w0.203: 97.174,91.71 97.183,91.701 98.211,91.701 IC1.6 ; v1@97.491,91.516 97.768,91.238 98.174,91.238 IC1.7 ; C1.1@98.387,87.757 C1.1@98.683,88.053 ; C16.1@101.092,66.616 101.219,66.489 C16.1@101.126,66.396 ; C21.1@102.803,95.377 102.743,95.437 102.743,95.548 B2.9@104.019,95.548 ; B2.9@104.161,95.548 B2.9@104.019,95.548 ; B2.8@104.161,96.048 104.019,96.048 103.995,96.025 103.995,95.572 B2.9@104.019,95.548 ; C23.1@105.397,99.109 105.565,98.941 105.671,98.941 105.684,98.927 IC7.A1 107.55,99.482 107.696,99.628 v1(107.696,99.695) ; C23.1 105.403,99.121 105.403,99.815 v1(105.41,99.822) ; v1(105.791,78.809) IC5.2 ; B2.3@105.985,95.048 B2.3 106.628,95.048 107.12,94.556 107.12,94.038 C20.1@107.188,93.97 ; B2.5@105.985,96.048 B2.5 ; IC3.EXP@106.245,64.262 106.753,64.77 107.245,65.262 IC3.45 ; IC3.31 106.445,55.861 108.585,53.721 108.585,49.784 107.62,48.819 107.62,48.271 C15.1 ; C20.1@106.986,93.726 C20.1@107.087,93.827 ; C20.1 C20.1@107.045,93.827 ; C20.1@107.061,93.853 C20.1@107.087,93.827 ; v1(108.229,59.458) 108.222,59.45 108.222,58.964 108.495,58.691 Y1.2 ; C22.1 109.964,100.67 IC6.4 ; C20.1@107.045,93.827 C20.1@107.087,93.827 ; C20.1@107.045,93.827 106.84,93.827 106.814,93.853 106.687,93.726 106.816,93.598 C20.1@107.045,93.827
  Top Layer (SIG) w0.381: RF3.1 RF3.1@106.848,44.45
  other v1: 95.25,39.878 97.231,39.878 99.212,39.878 101.194,39.878 103.175,39.878 105.156,39.878 106.934,39.878 108.5,39.878 110.067,39.878 111.633,39.878 107.696,41.056 105.156,41.275 95.25,41.753 111.633,41.756 106.934,42.164 105.156,42.418 106.934,43.434 105.156,43.561 95.25,43.629 111.633,43.634 107.823,44.45 105.156,44.704 95.25,45.504 111.633,45.512 105.156,45.847 106.934,45.847 105.156,46.99 106.934,46.99 95.25,47.379 111.633,47.39 105.156,48.133 108.585,48.133 95.25,49.255 111.633,49.268 104.013,49.657 108.077,49.657 104.013,50.8 108.077,50.8 95.25,51.13 111.633,51.146 104.013,51.943 108.053,52.109 105.537,52.832 106.553,52.832 95.25,53.006 111.633,53.024 105.537,53.848 106.553,53.848 95.25,54.881 111.633,54.902 105.537,54.991 106.553,54.991 105.537,56.134 95.25,56.756 111.633,56.781 105.537,57.277 105.537,58.42 95.25,58.632 111.633,58.659 105.537,59.563 95.25,60.507 111.633,60.537 101.727,61.087 95.25,62.382 111.633,62.415 97.155,63.627 95.25,64.258 111.633,64.293 100.457,64.897 95.25,66.133 111.633,66.171 103.536,67.382 95.25,68.008 111.633,68.049 101.6,68.326 99.441,68.834 95.25,69.884 111.633,69.927 103.759,71.501 107.315,71.628 95.25,71.759 111.633,71.805 101.092,72.517 95.25,73.635 111.633,73.683 103.759,74.168 107.315,74.803 98.419,75.026 95.25,75.51 111.633,75.561 95.25,77.385 111.633,77.439 95.25,79.261 111.633,79.317 95.25,81.136 111.633,81.195 101.346,81.915 95.25,83.011 111.633,83.073 104.902,84.328 95.25,84.887 111.633,84.951 95.25,86.762 111.633,86.829 95.25,88.638 111.633,88.708 101.092,89.408 95.25,90.513 111.633,90.586 97.458,91.482 95.25,92.388 104.013,92.456 111.633,92.464 101.395,93.335 105.918,93.853 97.409,94.234 95.25,94.264 111.633,94.342 99.695,94.996 95.25,96.139 99.695,96.164 111.633,96.22 102.743,96.393 107.696,96.393 96.774,97.409 101.727,97.409 104.267,97.409 106.553,97.409 107.696,97.409 109.347,97.917 111.633,98.098 97.917,99.187 111.633,99.976 95.25,101.854 97.298,101.854 99.346,101.854 101.394,101.854 103.441,101.854 105.489,101.854 107.537,101.854 109.585,101.854 111.633,101.854
I2C_SCL: B2.2 IC3.12 IC5.7 IC6.2 IC7.A2 J4.1 R4.1 | length 49.1
  Top Layer (SIG) w0.203: R4.1 103.203,69.205 103.811,69.205 103.874,69.142 v1(103.941,69.142) 104.045,69.039 IC3.12@104.045,67.56 ; v1(105.156,95.504) 105.41,95.25 B2.2 ; IC5.7 107.917,78.811 109.36,78.811 v1(109.362,78.813) ; IC7.A2@108.35,98.928 110.625,98.928 110.744,98.809 110.744,98.398 IC6.2 110.763,96.928 v1(109.332,95.496) 109.332,91.455 J4.1
  Bottom Layer (SIG) w0.203: v1(103.941,69.142) 103.941,69.772 109.347,75.178 v1@109.347,78.74 ; v1(105.156,95.504) 109.324,95.504 v1(109.332,95.496) ; v1(109.362,78.813) v1@109.362,95.377
I2C_SDA: B2.4 IC3.11 IC5.8 IC6.1 IC7.B2 J3.1 R3.1 | length 47.3
  Top Layer (SIG) w0.203: R3.1 v1(104.013,70.485) 104.08,70.485 104.445,70.12 IC3.11 ; B2.4 107.144,95.548 107.95,94.742 v1(108.531,94.742) ; IC5.8 107.925,79.699 108.717,79.699 v1(108.727,79.689) ; IC7.B2 109.915,98.527 109.963,98.479 IC6.1 109.963,97.009 108.712,95.758 108.712,94.984 108.531,94.803 v1(108.531,94.742) ; J3.1 108.531,89.97 v1(108.531,94.742)
  Bottom Layer (SIG) w0.203: v1(104.013,70.485) 108.727,75.199 v1(108.727,79.689) 108.727,94.5 108.531,94.696 v1(108.531,94.742)
LED_RED_ANODE: D1.1 R7.2 | length 3.4
  Top Layer (SIG) w0.254: R7.2@102.882,82.677 D1.1
LED_RED_CATHODE: D1.2 IC4.3 | length 3.1
  Top Layer (SIG) w0.254: D1.2 104.448,86.04 IC4.3
LED_RED_EN: IC3.10 IC4.1 R12.2 | length 17.6
  Top Layer (SIG) w0.2: IC3.10 104.845,79.445 106.807,81.407 IC4.1@106.807,84.03
NetA1_S: A1.S RF2.2 | length 3.6
  Top Layer (SIG) w0.305: A1.S@105.674,35.56 106.045,35.931
  Top Layer (SIG) w0.381: 106.045,35.931 RF2.2
NetC15_2: C15.2 J1.C L2.1 | length 2.7
  Top Layer (SIG) w0.381: L2.1 C15.2@106.045,47.803 ; J1.C 106.045,48.22 C15.2
NetIC1_2: IC1.2 L1.2 | length 1.5
  Top Layer (SIG) w0.254: IC1.2 100.374,91.19 100.519,91.045 100.989,91.045 L1.2@101.219,90.815
NetIC1_3: IC1.3 L1.1 | length 1.5
  Top Layer (SIG) w0.254: IC1.3 100.369,91.69 100.516,91.837 100.991,91.837 L1.1@101.219,92.065
NetIC1_8: IC1.8 R1.1 R2.2 | length 3.1
  Top Layer (SIG) w0.254: R2.2@97.016,90.69 IC1.8 98.234,90.678 98.806,90.678 98.998,90.486 R1.1
NetJ2_1: J2.1 R5.1 | length 4.9
  Top Layer (SIG) w0.2: R5.1@99.568,83.439 99.568,79.026 99.822,78.772 J2.1
NetJ2_3: J2.3 R6.1 | length 8.1
  Top Layer (SIG) w0.2: R6.1 98.552,72.494 100.457,74.399 100.457,76.677 99.822,77.312 J2.3
NetL2_2: L2.2 RF1.1 RF3.2 | length 2.6
  Top Layer (SIG) w0.381: RF1.1 RF3.2 L2.2
NetRF1_2: RF1.2 RF2.1 RF4.2 | length 2.6
  Top Layer (SIG) w0.381: RF2.1 RF4.2 RF1.2
PB_INT: C19.1 IC3.24 R6.2 R8.1 S1.2 | length 9.2
  Top Layer (SIG) w0.2: S1.2@98.515,62.079 98.583,62.011 R8.1 ; S1.2@98.515,65.429 98.552,65.466 R6.2 ; S1.2@98.806,65.339 S1.2@98.896,65.429 ; R8.1@100.457,62.062 IC3.24 ; C19.1@101.471,61.883 C19.1@101.473,61.881
RTC_INT: IC3.9 IC5.4 R11.1 | length 11.2
  Top Layer (SIG) w0.2: IC3.9 R11.1@105.245,76.035 ; R11.1 105.261,76.127 105.261,76.805 105.378,76.922 106.628,76.922 IC5.4
SWCLK: IC3.25 J2.4 | length 19.4
  Top Layer (SIG) w0.152: J2.4@101.092,77.216 101.166,77.142 101.166,76.842 101.687,76.32 101.687,75.794 v1(102.428,75.053)
  Top Layer (SIG) w0.2: J2.4@101.092,77.216 J2.4 ; v1@103.759,60.19 103.759,60.198 104.045,60.484 IC3.25
  Bottom Layer (SIG) w0.2: v1(102.428,75.053) 102.492,74.989 102.492,61.457 v1@103.759,60.19
  other v1: 103.759,60.255
SWDIO: IC3.26 J2.2 | length 24
  Top Layer (SIG) w0.2: J2.2@101.013,78.692 101.092,78.772 J2.2 ; 101.571,78.376 101.092,78.376 v1(102.049,78.376) ; IC3.26 104.445,60.274 v1(104.464,60.255)
  Bottom Layer (SIG) w0.2: v1(102.049,78.376) 103.488,78.376 104.483,77.381 104.483,75.908 102.867,74.292 102.867,61.852 v1(104.464,60.255)
V_BAT: B1.POS C2.2 C3.2 IC2.1 IC2.3 R10.1 | length 11.2
  Top Layer (SIG) w0.305: B1.POS 103.646,99.455 104.46,100.269 104.46,100.488 R10.1
  Top Layer (SIG) w0.381: IC2.3@98.745,98.476 C2.2@98.745,100.711 ; C2.2@98.756,100.711 C3.2 ; IC2.1@100.645,98.476 100.645,98.679 C3.2@100.645,100.33 ; IC2.1@100.734,98.349 100.734,98.679 102.842,98.679 103.221,99.058 B1.POS
V_DIODE_OUT: C4.2 C6.2 IC1.4 IC1.5 IC2.5 | length 7.2
  Top Layer (SIG) w0.254: C6.2 96.859,92.185 98.217,92.185 IC1.5 IC1.4 99.985,92.19 99.985,93.849 C4.2
  Top Layer (SIG) w0.381: C4.2 99.989,93.903 100.635,94.549 100.635,95.824 IC2.5
V_REG_3V: B2.1 B2.6 B2.10 C1.2 C9.2 C16.2 C17.2 C18.2 C19.2 C20.2 C21.2 C22.2 C23.2 IC1.1 IC3.13 IC3.36 IC3.48 IC5.5 IC6.3 IC7.B1 R1.2 R3.2 R4.2 R5.2 R7.1 R8.2 R11.2 | length 32.1
  Top Layer (SIG) w0.2: R8.2 101.834,63.211 C19.2@101.854,63.231 ; v1(102.04,64.702) C16.2 ; R7.1 v1(105.029,82.677) ; R11.2 106.347,75.946 106.373,75.921 v1(107.162,75.921) ; IC3.48 C17.2@110.744,66.462 ; C9.2 110.044,61.208 110.044,61.598 110.295,61.849 v1(110.363,61.849)
  Top Layer (SIG) w0.203: R5.2 v1(101.092,83.439) ; v1(101.473,69.215) R4.2 ; v1(101.473,70.485) R3.2 ; C19.2@101.854,63.231 C19.2 102.04,63.599 v1(102.04,64.702) ; C16.2@102.253,66.462 IC3.13 ; v1(102.743,93.218) 102.743,94.097 102.733,94.107 C21.2 ; v1(104.057,93.887) 104.057,95.025 104.081,95.048 B2.10@104.161,95.048 ; v1(104.913,93.872) B2.1@104.913,94.471 ; B2.6 v1(105.41,97.409) 105.41,98.416 105.501,98.507 105.664,98.507 105.684,98.527 IC7.B1 ; v1(106.053,92.515) 106.983,92.515 C20.2 ; v1(107.162,75.921) C18.2@107.814,75.921 ; IC5.5 107.915,75.981 C18.2 ; IC3.36 108.445,60.965 108.45,60.96 109.725,60.96 C9.2@109.725,61.211 ; C17.2@110.542,66.778 110.548,66.784 111.238,66.784 v1(111.245,66.791) ; v1(110.744,101.6) 110.773,101.571 110.773,100.741 C22.2 110.758,100.666 110.758,99.784 IC6.3
  Top Layer (SIG) w0.432: v2(99.898,84.963) v2(99.898,86.233) C1.2 R1.2 IC1.1@99.898,90.582
XC1: C8.1 IC3.34 Y1.3 | length 6
  Top Layer (SIG) w0.2: IC3.34 107.645,57.836 107.84,57.641 Y1.3 108.585,57.601 108.585,56.589 108.594,56.58 C8.1 ; C8.1@108.594,56.589 C8.1@108.795,56.388
XC2: C7.2 IC3.35 Y1.1 | length 4.1
  Top Layer (SIG) w0.2: IC3.35 108.045,60.452 108.462,60.034 109.723,60.034 109.895,59.862 109.895,58.859 Y1.1@110.063,58.691
XTAL_32K_1: C11.2 IC3.2 Y2.1 | length 5.5
  Top Layer (SIG) w0.2: IC3.2 108.045,68.167 108.458,68.58 108.458,69.997 Y2.1 108.565,72.565 C11.2
XTAL_32K_2: C13.2 IC3.3 Y2.2 | length 6.2
  Top Layer (SIG) w0.2: Y2.2@106.045,70.104 C13.2@106.045,72.806 ; Y2.2 106.065,69.704 106.465,69.304 106.479,69.304 107.645,68.138 IC3.3